# Altium PCB PCB_mathpad1_2024-01-19.pcbdoc
Units mm, origin at the board's own origin, x right, y up, seen from the top; angles counter-clockwise.
Board outline 193.1 x 243.5 mm, 2 copper layers (Top Layer, Bottom Layer); 89 components, 64 nets, 319 pads, 90 vias.
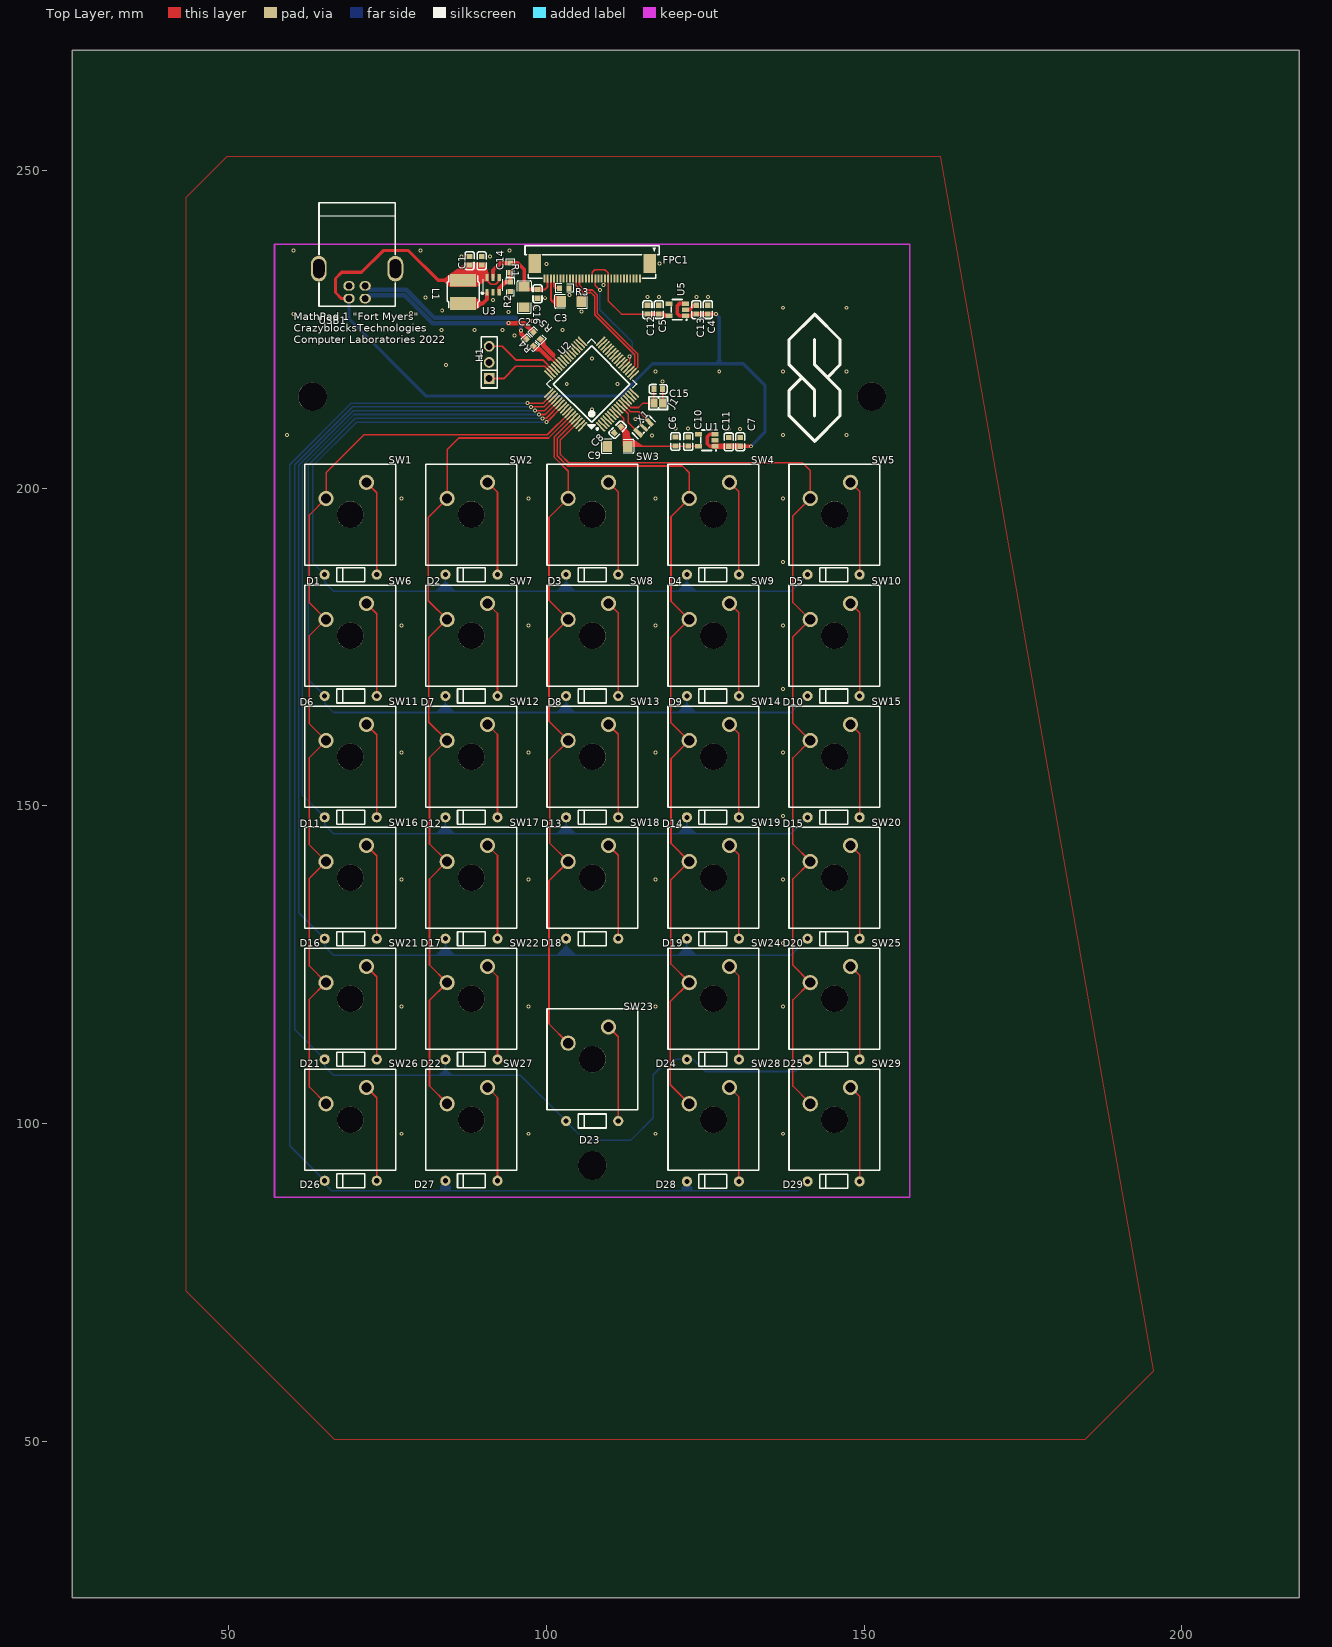
[diagram p0: Top Layer view]
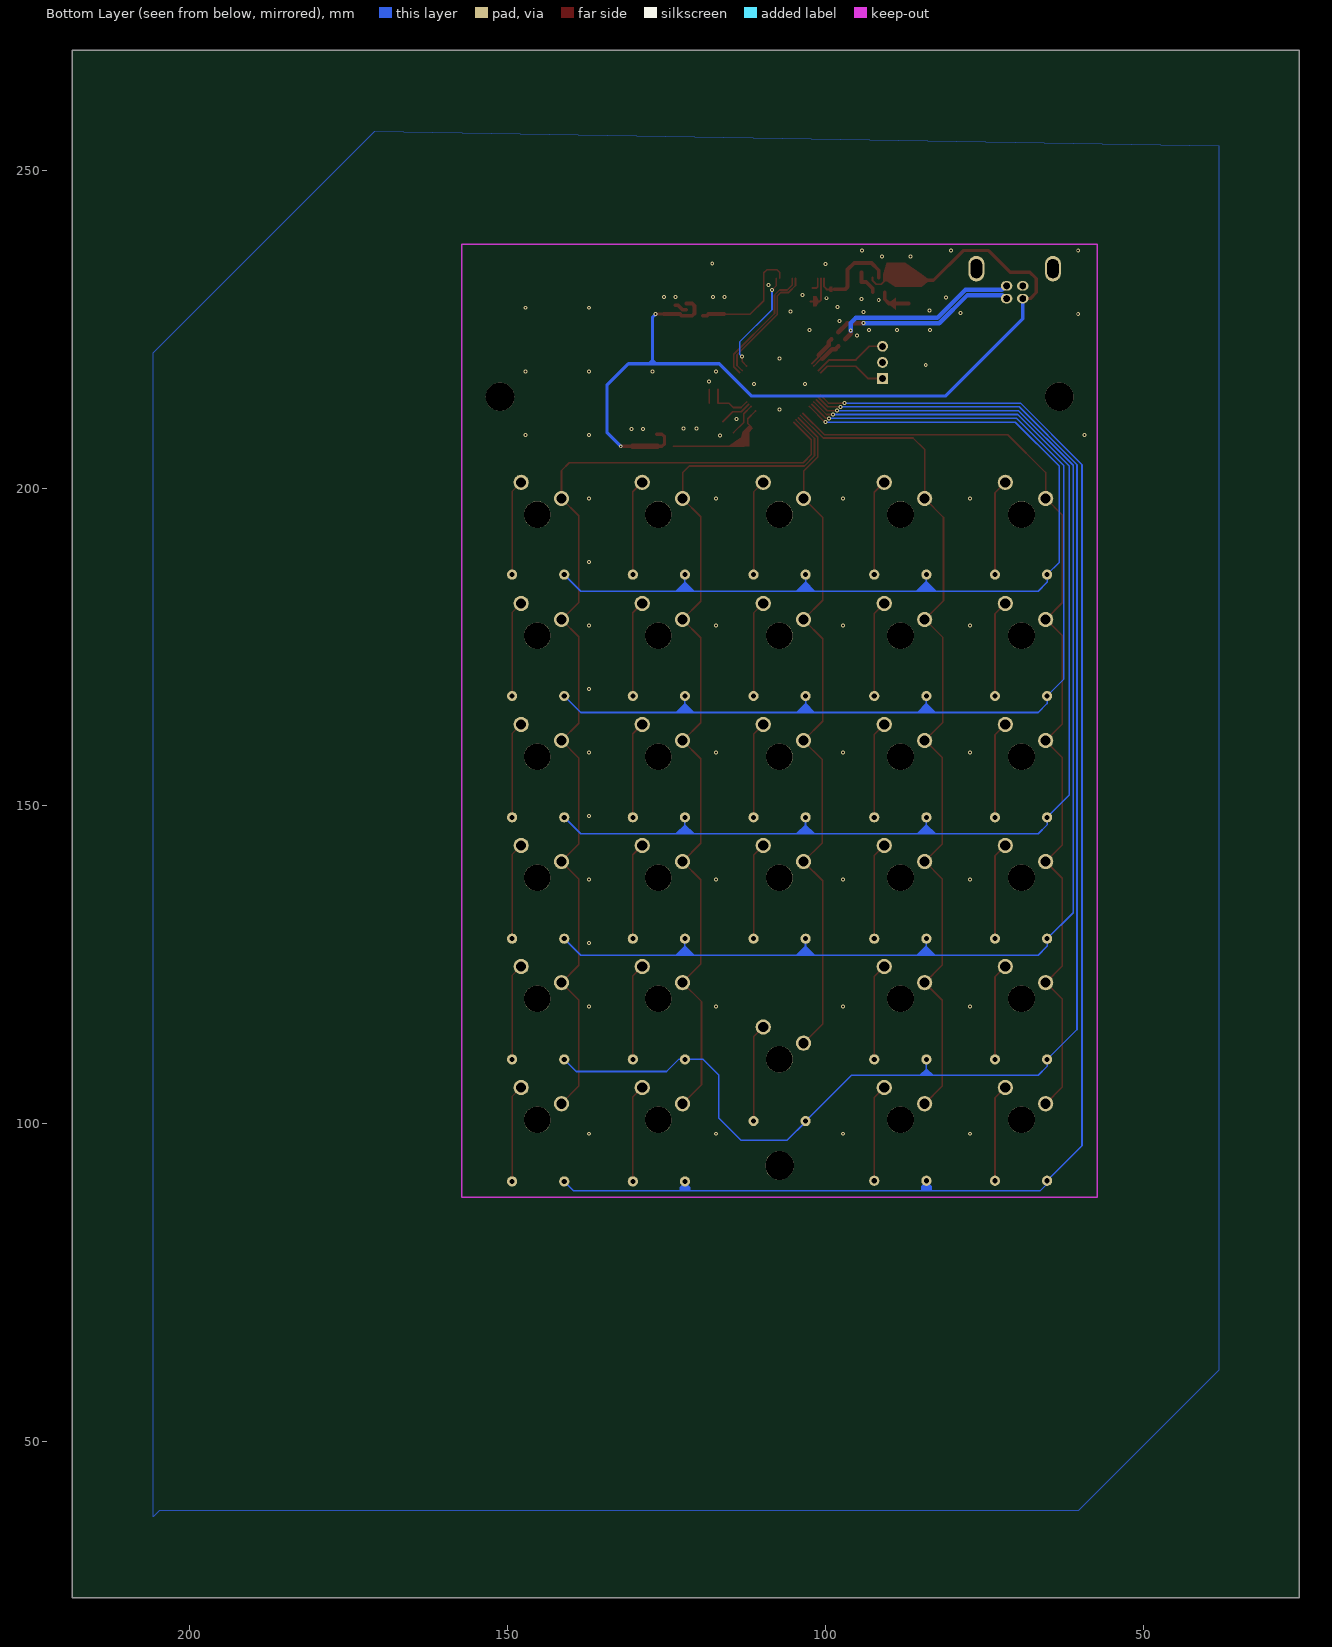
[diagram p1: Bottom Layer view, seen from below]

## Layer stack, top to bottom
Top Layer: signal copper (thickness not stored)
Dielectric: dielectric 0.32, FR-4, Dk 4.8
Bottom Layer: signal copper (thickness not stored)

## Board outline
218.5,25.4 25.4,25.4 25.4,268.9 218.5,268.9

## Components (designator, comment, footprint, x,y, rotation, side; value= is the part's Value field where it differs from the comment)
C1 "1uF" C0603 87.9,235.8 r270 top
C2 "4.7uF" C1206 96.5,230.1 r270 top
C3 "4.7uF" C1206 103.9,229.4 r0 top
C4 "1uF" C0603 125.4,228.1 r270 top
C5 "1uF" C0603 117.7,228.1 r270 top
C6 "1uF" C0603 120.3,207.35 r270 top
C7 "1uF" C0603 130.5,207.3 r270 top
C8 "100nF" C0603 111.2,209.2 r225 top
C9 "4.7uF" C1206 111.2,206.6 r180 top
C10 "100nF" C0603 122.32,207.35 r90 top
C11 "100nF" C0603 128.7,207.3 r90 top
C12 "100nF" C0603 115.9,228.1 r90 top
C13 "100nF" C0603 123.6,228.1 r90 top
C14 "100nF" C0603 89.8,235.8 r90 top
C15 "100nF" C0603 117.6,215.6 r0 top
C16 "100nF" C0603 98.6,230.6 r270 top
D1 "1N4148TR-C84412" DO-35_BD2.0-L4.2-P8.20-D0.5-RD 69.2,186.4 r0 top
D2 "1N4148TR-C84412" DO-35_BD2.0-L4.2-P8.20-D0.5-RD 88.2,186.4 r0 top
D3 "1N4148TR-C84412" DO-35_BD2.0-L4.2-P8.20-D0.5-RD 107.2,186.4 r0 top
D4 "1N4148TR-C84412" DO-35_BD2.0-L4.2-P8.20-D0.5-RD 126.2,186.4 r0 top
D5 "1N4148TR-C84412" DO-35_BD2.0-L4.2-P8.20-D0.5-RD 145.2,186.4 r0 top
D6 "1N4148TR-C84412" DO-35_BD2.0-L4.2-P8.20-D0.5-RD 69.2,167.3 r0 top
D7 "1N4148TR-C84412" DO-35_BD2.0-L4.2-P8.20-D0.5-RD 88.2,167.3 r0 top
D8 "1N4148TR-C84412" DO-35_BD2.0-L4.2-P8.20-D0.5-RD 107.2,167.3 r0 top
D9 "1N4148TR-C84412" DO-35_BD2.0-L4.2-P8.20-D0.5-RD 126.2,167.3 r0 top
D10 "1N4148TR-C84412" DO-35_BD2.0-L4.2-P8.20-D0.5-RD 145.2,167.3 r0 top
D11 "1N4148TR-C84412" DO-35_BD2.0-L4.2-P8.20-D0.5-RD 69.2,148.2 r0 top
D12 "1N4148TR-C84412" DO-35_BD2.0-L4.2-P8.20-D0.5-RD 88.2,148.2 r0 top
D13 "1N4148TR-C84412" DO-35_BD2.0-L4.2-P8.20-D0.5-RD 107.2,148.2 r0 top
D14 "1N4148TR-C84412" DO-35_BD2.0-L4.2-P8.20-D0.5-RD 126.2,148.2 r0 top
D15 "1N4148TR-C84412" DO-35_BD2.0-L4.2-P8.20-D0.5-RD 145.2,148.2 r0 top
D16 "1N4148TR-C84412" DO-35_BD2.0-L4.2-P8.20-D0.5-RD 69.2,129.1 r0 top
D17 "1N4148TR-C84412" DO-35_BD2.0-L4.2-P8.20-D0.5-RD 88.2,129.1 r0 top
D18 "1N4148TR-C84412" DO-35_BD2.0-L4.2-P8.20-D0.5-RD 107.2,129.1 r0 top
D19 "1N4148TR-C84412" DO-35_BD2.0-L4.2-P8.20-D0.5-RD 126.2,129.1 r0 top
D20 "1N4148TR-C84412" DO-35_BD2.0-L4.2-P8.20-D0.5-RD 145.2,129.1 r0 top
D21 "1N4148TR-C84412" DO-35_BD2.0-L4.2-P8.20-D0.5-RD 69.2,110.1 r0 top
D22 "1N4148TR-C84412" DO-35_BD2.0-L4.2-P8.20-D0.5-RD 88.2,110.1 r0 top
D23 "1N4148TR-C84412" DO-35_BD2.0-L4.2-P8.20-D0.5-RD 107.2,100.4 r0 top
D24 "1N4148TR-C84412" DO-35_BD2.0-L4.2-P8.20-D0.5-RD 126.2,110.1 r0 top
D25 "1N4148TR-C84412" DO-35_BD2.0-L4.2-P8.20-D0.5-RD 145.2,110.1 r0 top
D26 "1N4148TR-C84412" DO-35_BD2.0-L4.2-P8.20-D0.5-RD 69.2,91 r0 top
D27 "1N4148TR-C84412" DO-35_BD2.0-L4.2-P8.20-D0.5-RD 88.2,91 r0 top
D28 "1N4148TR-C84412" DO-35_BD2.0-L4.2-P8.20-D0.5-RD 126.2,90.9 r0 top
D29 "1N4148TR-C84412" DO-35_BD2.0-L4.2-P8.20-D0.5-RD 145.2,90.9 r0 top
FPC1 "0.5K-AX-31PWB" FPC-SMD_31P-P0.50_HDGC_0.5K-AX-31PWB 107.2,234.2 r180 top
H1 "DZ254R-11-03-63" HDR-TH_3P-P2.54-V-M 91,219.8 r90 top
J1 "JUMPER_SOLDER_1X2" JUMPER_SOLDER_1X2 117.6,213.4 r180 top
L1 "10uH" IND-SMD_L5.0-W5.0_LQH5BPBXX 86.9,230.9 r270 top
R1 "1M" R0603 94.3,234.7 r270 top
R2 "68K" R0603 94.3,231.7 r270 top
R3 "910K" R0603 102.8,231.5 r180 top
R4 "0" R0603 97.4,222.9 r135 top
R5 "0" R0603 98.5,224 r135 top
SW1 "CPG151101D93" SW-TH_CPG151101D9X 68.5,199.65 r0 top
SW2 "CPG151101D93" SW-TH_CPG151101D9X 87.55,199.65 r0 top
SW3 "CPG151101D93" SW-TH_CPG151101D9X 106.6,199.65 r0 top
SW4 "CPG151101D93" SW-TH_CPG151101D9X 125.65,199.65 r0 top
SW5 "CPG151101D93" SW-TH_CPG151101D9X 144.7,199.65 r0 top
SW6 "CPG151101D93" SW-TH_CPG151101D9X 68.5,180.6 r0 top
SW7 "CPG151101D93" SW-TH_CPG151101D9X 87.55,180.6 r0 top
SW8 "CPG151101D93" SW-TH_CPG151101D9X 106.6,180.6 r0 top
SW9 "CPG151101D93" SW-TH_CPG151101D9X 125.65,180.6 r0 top
SW10 "CPG151101D93" SW-TH_CPG151101D9X 144.7,180.6 r0 top
SW11 "CPG151101D93" SW-TH_CPG151101D9X 68.5,161.55 r0 top
SW12 "CPG151101D93" SW-TH_CPG151101D9X 87.55,161.55 r0 top
SW13 "CPG151101D93" SW-TH_CPG151101D9X 106.6,161.55 r0 top
SW14 "CPG151101D93" SW-TH_CPG151101D9X 125.65,161.55 r0 top
SW15 "CPG151101D93" SW-TH_CPG151101D9X 144.7,161.55 r0 top
SW16 "CPG151101D93" SW-TH_CPG151101D9X 68.5,142.5 r0 top
SW17 "CPG151101D93" SW-TH_CPG151101D9X 87.55,142.5 r0 top
SW18 "CPG151101D93" SW-TH_CPG151101D9X 106.6,142.5 r0 top
SW19 "CPG151101D93" SW-TH_CPG151101D9X 125.65,142.5 r0 top
SW20 "CPG151101D93" SW-TH_CPG151101D9X 144.7,142.5 r0 top
SW21 "CPG151101D93" SW-TH_CPG151101D9X 68.5,123.45 r0 top
SW22 "CPG151101D93" SW-TH_CPG151101D9X 87.55,123.45 r0 top
SW23 "CPG151101D93" SW-TH_CPG151101D9X 106.6,113.925 r0 top
SW24 "CPG151101D93" SW-TH_CPG151101D9X 125.65,123.45 r0 top
SW25 "CPG151101D93" SW-TH_CPG151101D9X 144.7,123.45 r0 top
SW26 "CPG151101D93" SW-TH_CPG151101D9X 68.5,104.4 r0 top
SW27 "CPG151101D93" SW-TH_CPG151101D9X 87.55,104.4 r0 top
SW28 "CPG151101D93" SW-TH_CPG151101D9X 125.65,104.4 r0 top
SW29 "CPG151101D93" SW-TH_CPG151101D9X 144.7,104.4 r0 top
U1 "RT9078-33GJ5" TSOT-23-5_L2.9-W1.6-P0.95-LS2.8-BR 125.23,207.55 r0 top
U2 "STM32G0B1RCT6" LQFP-64_L10.0-W10.0-P0.50-LS12.0-BL 107.1,216.4 r45 top
U3 "TLV61046ADBVR" SOT-23-6_L2.9-W1.6-P0.95-LS2.8-BL 91.6,232 r0 top
U5 "RT9078-33GJ5" TSOT-23-5_L2.9-W1.6-P0.95-LS2.8-BR 120.6,228.1 r0 top
USB1 "U241-041N-1BR85-1" USB-B-TH_U241-041N-1BR85-1 70.2,232.2 r180 top
X1 "8MHz" OSC-SMD_3P-L3.2-W1.3-P1.2-L 115.3,209.6 r45 top

## Footprints (in the part's own frame and the unit in brackets; to place one, negate y for a bottom-side part, rotate by r counter-clockwise, add the part's x,y. Pads: shape width x height; smd on the part's side, far side on the other; paste and mask are expansions set on the pad)
C0603 [mm]
  rect 0.8x0.9 smd paste+0 mask+0.051: 1(-0.7,0) 2(0.7,0)
  silkscreen extent -1.41,-0.71 1.39,0.72
C1206 [mm]
  rect 1.485x1.728 smd paste-100 mask+0.051: 1(-1.593,0) 2(1.593,0)
  silkscreen extent -2.56,-1.09 2.56,1.09
DO-35_BD2.0-L4.2-P8.20-D0.5-RD [mm]
  round 1.6 hole 0.8 paste+0 mask+0.051: 1(-4.1,0) 2(4.1,0)
  silkscreen extent -2.2,-1.1 2.2,1.1
FPC-SMD_31P-P0.50_HDGC_0.5K-AX-31PWB [mm]
  rect 0.3x1.25 smd paste+0 mask+0.05: 1(-7.5,1.163) 2(-7,1.163) 3(-6.5,1.163) 4(-6,1.163) 5(-5.5,1.163) 6(-5,1.163) 7(-4.5,1.163) 8(-4,1.163) 9(-3.5,1.163) 10(-3,1.163) 11(-2.5,1.163) 12(-2,1.163) 13(-1.5,1.163) 14(-1,1.163) 15(-0.5,1.163) 16(0,1.163) 17(0.5,1.163) 18(1,1.163) 19(1.5,1.163) 20(2,1.163) 21(2.5,1.163) 22(3,1.163) 23(3.5,1.163) 24(4,1.163) 25(4.5,1.163) 26(5,1.163) 27(5.5,1.163) 28(6,1.163) 29(6.5,1.163) 30(7,1.163) 31(7.5,1.163)
  rect 2x3 smd paste+0 mask+0.05: 32(9.04,-1.162) 33(-9.04,-1.162)
  silkscreen extent -10.57,-3.96 10.58,1.16
HDR-TH_3P-P2.54-V-M [mm]
  rect 1.7x1.7 hole 1.1 paste+0 mask+0.051: 1(-2.54,0)
  round 1.7 hole 1.1 paste+0 mask+0.051: 2(0,0) 3(2.54,0)
  silkscreen extent -4.02,-1.27 4.02,1.27
IND-SMD_L5.0-W5.0_LQH5BPBXX [mm]
  rect 2x4.1 smd paste+0 mask+0.051: 1(-1.825,0) 2(1.824,0)
  silkscreen extent -2.52,-2.5 2.5,2.5
JUMPER_SOLDER_1X2 [mil]
  rect 45x56 smd paste+0 mask+2: 1(-26,0) 2(26,0)
  silkscreen extent -58,-39 58,39
LQFP-64_L10.0-W10.0-P0.50-LS12.0-BL [mm]
  oval 0.3x2 smd paste+0 mask+0.051: 1(-3.75,-5.75) 2(-3.25,-5.75) 3(-2.75,-5.75) 4(-2.25,-5.75) 5(-1.75,-5.75) 6(-1.25,-5.75) 7(-0.75,-5.75) 8(-0.25,-5.75) 9(0.25,-5.75) 10(0.75,-5.75) 11(1.25,-5.75) 12(1.75,-5.75) 13(2.25,-5.75) 14(2.75,-5.75) 15(3.25,-5.75) 16(3.75,-5.75) 33(3.75,5.75) 34(3.25,5.75) 35(2.75,5.75) 36(2.25,5.75) 37(1.75,5.75) 38(1.25,5.75) 39(0.75,5.75) 40(0.25,5.75) 41(-0.25,5.75) 42(-0.75,5.75) 43(-1.25,5.75) 44(-1.75,5.75) 45(-2.25,5.75) 46(-2.75,5.75) 47(-3.25,5.75) 48(-3.75,5.75)
  oval 2x0.3 smd paste+0 mask+0.051: 17(5.75,-3.75) 18(5.75,-3.25) 19(5.75,-2.75) 20(5.75,-2.25) 21(5.75,-1.75) 22(5.75,-1.25) 23(5.75,-0.75) 24(5.75,-0.25) 25(5.75,0.25) 26(5.75,0.75) 27(5.75,1.25) 28(5.75,1.75) 29(5.75,2.25) 30(5.75,2.75) 31(5.75,3.25) 32(5.75,3.75) 49(-5.75,3.75) 50(-5.75,3.25) 51(-5.75,2.75) 52(-5.75,2.25) 53(-5.75,1.75) 54(-5.75,1.25) 55(-5.75,0.75) 56(-5.75,0.25) 57(-5.75,-0.25) 58(-5.75,-0.75) 59(-5.75,-1.25) 60(-5.75,-1.75) 61(-5.75,-2.25) 62(-5.75,-2.75) 63(-5.75,-3.25) 64(-5.75,-3.75)
  silkscreen extent -5,-5.79 5,5
OSC-SMD_3P-L3.2-W1.3-P1.2-L [mm]
  rect 0.65x1.7 smd paste+0 mask+0.051: 1(-1.2,0) 3(1.2,0)
  rect 0.5x1.7 smd paste+0 mask+0.051: 2(0,0)
  silkscreen extent -1.9,-0.65 1.9,0.65
R0603 [mm]
  rect 0.806x0.864 smd paste-100 mask+0.051: 1(-0.753,0) 2(0.753,0)
  silkscreen extent -1.39,-0.66 1.39,0.66
SOT-23-6_L2.9-W1.6-P0.95-LS2.8-BL [mm]
  rect 0.532x1.072 smd paste+0 mask+0.051: 1(-0.95,-1.149) 2(0,-1.149) 3(0.95,-1.149) 4(0.95,1.149) 5(0,1.149) 6(-0.95,1.149)
  silkscreen extent -1.82,-1.45 1.54,0.89
SW-TH_CPG151101D9X [mm]
  round 2.4 hole 1.6 paste+0 mask+0.051: 1(-3.175,-1.27) 2(3.175,1.27)
  round 4.2 hole 4.2 unplated paste+0: ""(0.635,-3.81)
  silkscreen extent -6.51,-11.76 7.79,4.13
TSOT-23-5_L2.9-W1.6-P0.95-LS2.8-BR [mm]
  rect 1.1x0.7 smd paste+0 mask+0.051: 1(1.294,-0.951) 2(1.294,-0.001) 3(1.294,0.951) 4(-1.294,0.951) 5(-1.294,-0.949)
  silkscreen extent -0.97,-1.65 1.52,1.61
USB-B-TH_U241-041N-1BR85-1 [mm]
  oval 1.8x1.5 hole 1 paste+0 mask+0.051: 1(1.27,2.355) 2(-1.27,2.355) 3(-1.27,0.355) 4(1.27,0.355)
  oval 2.5x4 hole 1.8 slot 3 at 90 deg paste+0 mask+0.051: 5(6.025,-2.355) 6(-6.025,-2.355)
  silkscreen extent -6,-12.76 6,3.55

## Free pads (board coordinates)
  round 4.5 hole 4.5 unplated paste+0: ""(63.2,214.4) ""(107.2,93.4) ""(151.2,214.4)

## Via types
v1: diameter 0.62, hole 0.31, Top Layer to Bottom Layer, tented both sides, 90 vias

## Nets (pads, with @x,y where several pads share a name; then routed paths per layer and width w, separated by ;. In a path a pad name is that pad's centre, name@x,y a point inside that pad or via, vN(x,y) a via of type N, cw(c..) or ccw(c..) an arc to the next point about the centre after c; other vN are vias at no path point)
D2_2: D2.2 SW2.2 | length 15.2
  Top Layer w0.25: SW2.2 92.3,199.345 D2.2
D3_2: D3.2 SW3.2 | length 15.2
  Top Layer w0.25: SW3.2 111.3,199.395 D3.2
D4_2: D4.2 SW4.2 | length 15.1
  Top Layer w0.25: SW4.2 130.3,199.445 D4.2
D5_2: D5.2 SW5.2 | length 15.1
  Top Layer w0.25: SW5.2 149.3,199.495 D5.2
D6_2: D6.2 SW6.2 | length 15.2
  Top Layer w0.25: SW6.2 73.3,180.245 D6.2
D7_2: D7.2 SW7.2 | length 15.2
  Top Layer w0.25: SW7.2 92.3,180.295 D7.2
D8_2: D8.2 SW8.2 | length 15.2
  Top Layer w0.25: SW8.2 111.3,180.345 D8.2
D9_2: D9.2 SW9.2 | length 15.2
  Top Layer w0.25: SW9.2 130.3,180.395 D9.2
D10_2: D10.2 SW10.2 | length 15.2
  Top Layer w0.25: SW10.2 149.3,180.445 D10.2
D11_2: D11.2 SW11.2 | length 15.3
  Top Layer w0.25: SW11.2 73.3,161.195 D11.2
D12_2: D12.2 SW12.2 | length 15.3
  Top Layer w0.25: SW12.2 92.3,161.245 D12.2
D13_2: D13.2 SW13.2 | length 15.3
  Top Layer w0.25: SW13.2 111.3,161.295 D13.2
D14_2: D14.2 SW14.2 | length 15.2
  Top Layer w0.25: SW14.2 130.3,161.345 D14.2
D15_2: D15.2 SW15.2 | length 15.2
  Top Layer w0.25: SW15.2 149.3,161.395 D15.2
D16_2: D16.2 SW16.2 | length 15.3
  Top Layer w0.25: SW16.2 73.3,142.145 D16.2
D17_2: D17.2 SW17.2 | length 15.3
  Top Layer w0.25: SW17.2 92.3,142.195 D17.2
D18_2: D18.2 SW18.2 | length 15.3
  Top Layer w0.25: SW18.2 111.3,142.245 D18.2
D19_2: D19.2 SW19.2 | length 15.3
  Top Layer w0.25: SW19.2 130.3,142.295 D19.2
D20_2: D20.2 SW20.2 | length 15.3
  Top Layer w0.25: SW20.2 149.3,142.345 D20.2
D21_2: D21.2 SW21.2 | length 15.3
  Top Layer w0.25: SW21.2 73.3,123.095 D21.2
D22_2: D22.2 SW22.2 | length 15.3
  Top Layer w0.25: SW22.2 92.3,123.145 D22.2
D23_2: D23.2 SW23.2 | length 15.4
  Top Layer w0.25: SW23.2 111.3,113.67 D23.2
D24_2: D24.2 SW24.2 | length 15.2
  Top Layer w0.25: SW24.2 130.3,123.245 D24.2
D25_2: D25.2 SW25.2 | length 15.2
  Top Layer w0.25: SW25.2 149.3,123.295 D25.2
D26_2: D26.2 SW26.2 | length 15.3
  Top Layer w0.25: SW26.2 73.3,104.045 D26.2
D27_2: D27.2 SW27.2 | length 15.3
  Top Layer w0.25: SW27.2 92.3,104.095 D27.2
D28_2: D28.2 SW28.2 | length 15.4
  Top Layer w0.25: SW28.2 130.3,104.195 D28.2
D29_2: D29.2 SW29.2 | length 15.4
  Top Layer w0.25: SW29.2 149.3,104.245 D29.2
DISP_3V3_IO: C5.2 C12.1 FPC1.11 FPC1.16 U5.5 | length 18.8
  Top Layer w0.25: FPC1.16 107.2,234 107.599,234.399 109.199,234.399 109.699,233.899 FPC1.11 ; FPC1.11 109.7,229.5 111.8,227.4 C12.1
  Top Layer w0.6: C12.1 118.4,227.4 118.649,227.151 U5.5
DISP_12V: C2.1 C16.1 FPC1.30 R1.1 U3.5 | length 15
  Top Layer w0.3: C16.1 99.8,231.3 100.2,231.699 FPC1.30
  Top Layer w0.6: U3.5 91.6,234.3 92.753,235.453 R1.1 95.447,235.453 96.5,234.4 C2.1 96.892,231.3 C16.1
DISP_CL: FPC1.20 U2.18 | length 19.8
  Top Layer w0.25: FPC1.20@105.201,233.038 105.201,231.999 106.001,231.199 107.2,231.199 108,230.399 108,227.5 114.401,221.1 114.401,219.103 U2.18
DISP_CS: FPC1.15 U2.21 | length 16.7
  Top Layer w0.25: FPC1.15 107.7,231.9 v1(108.4,231.2) ; U2.21 113.1,219.925 v1@113.1,220.7
  Bottom Layer w0.25: v1(108.4,231.2) 108.4,228.1 113.5,223 113.5,221.1 v1(113.1,220.7)
DISP_DO: FPC1.21 U2.19 | length 19.4
  Top Layer w0.25: FPC1.21 104.7,231.9 105.7,230.9 ; 105.699,230.899 105.8,230.8 106.999,230.8 107.599,230.2 107.599,227.3 113.9,221.001 113.9,219.311 U2.19
FPC1_28: FPC1.28 R3.2 | length 2.3
  Top Layer w0.3: FPC1.28@101.2,233.038 101.2,231.699 101.401,231.498 R3.2@102.046,231.498
FPC1_29: C3.1 FPC1.29 | length 5.1
  Top Layer w0.3: FPC1.29 100.7,229.598 100.901,229.4 C3.1@102.308,229.4
GND: C1.1 C2.2 C3.2 C4.1 C5.1 C6.1 C7.1 C8.2 C9.2 C10.2 C11.2 C12.2 C13.2 C14.2 C15.2 C16.2 FPC1.1 FPC1.2 FPC1.12 FPC1.13 FPC1.17 FPC1.18 FPC1.19 FPC1.32 FPC1.33 H1.2 J1.1 R2.2 R3.1 U1.2 U2.9 U3.2 U5.2 USB1.4 USB1.5 USB1.6 X1.2 | length 4.2
  Top Layer w0.25: J1.1@118.262,213.398 118.3,213.398 C15.2
  Top Layer w0.6: U5.2 122.499,228.099 123.2,228.8 C13.2
  other v1: 77.2,98.4 97.2,98.4 117.2,98.4 137.2,98.4 77.2,118.4 97.2,118.4 117.2,118.4 137.2,118.4 137.2,128.4 77.2,138.4 97.2,138.4 117.2,138.4 137.2,138.4 137.2,148.4 77.2,158.4 97.2,158.4 117.2,158.4 137.2,158.4 137.2,168.4 77.2,178.4 97.2,178.4 117.2,178.4 137.2,178.4 137.2,188.4 77.2,198.4 97.2,198.4 117.2,198.4 137.2,198.4 116.6,208.3 59.2,208.4 137.2,208.4 147.2,208.4 128.7,209.3 130.5,209.3 120.3,209.4 122.3,209.4 114,210.9 107.2,212.4 103.2,216.4 111.2,216.4 118.3,216.8 117.2,218.4 127.2,218.4 137.2,218.4 147.2,218.4 84.2,219.4 107.2,220.4 95,224 83.5,224.899 88.7,224.899 93.1,224.899 102.5,224.899 97.8,226.3 60.2,227.4 78.7,227.6 94,227.7 105.5,227.8 83.6,228 137.2,228.4 147.2,228.4 98.1,228.5 91.6,229.6 94.3,229.8 99.8,229.899 81,230 115.9,230.1 117.7,230.1 123.6,230.1 125.4,230.1 108.96,231.99 100,235.3 117.8,235.4 86.6,236.5 91.1,236.5 60.2,237.4 80.2,237.4 94.2,237.4
H1_1: H1.1 U2.47 | length 11
  Top Layer w0.3: H1.1 93.26,217.259 95.201,219.2 99.704,219.2 U2.47@100.736,218.166
H1_3: H1.3 U2.46 | length 11.7
  Top Layer w0.3: H1.3 93.06,222.339 95.2,220.2 99.4,220.2 U2.46
KEY_C1: SW1.1 SW6.1 SW11.1 SW16.1 SW21.1 SW26.1 U2.58 | length 152.4
  Top Layer w0.25: SW26.1 62.7,105.755 62.7,119.6 65.28,122.18 SW21.1 ; SW21.1@65.325,122.179 62.699,124.806 62.699,138.6 SW16.1@65.325,141.229 ; SW16.1 62.7,143.855 62.7,157.6 65.325,160.225 SW11.1 62.7,162.905 62.7,176.8 65.23,179.33 SW6.1 62.7,181.955 62.7,195.8 65.28,198.38 SW1.1 65.336,202.469 71.297,208.4 100.144,208.4 U2.58@103.565,211.803
KEY_C2: SW2.1 SW7.1 SW12.1 SW17.1 SW22.1 SW27.1 U2.59 | length 136.6
  Top Layer w0.25: SW27.1@84.375,103.129 81.599,105.906 81.599,119.401 SW22.1@84.375,122.179 ; SW22.1 81.6,124.955 81.6,138.5 84.33,141.23 SW17.1 81.6,144.005 81.6,157.6 84.28,160.28 SW12.1 81.5,163.155 81.5,176.5 84.33,179.33 SW7.1 81.401,182.304 81.401,195.4 84.375,198.379 84.375,206.076 86.199,207.899 100.344,207.899 U2.59
KEY_C3: SW3.1 SW8.1 SW13.1 SW18.1 SW23.1 U2.60 | length 110.6
  Top Layer w0.25: SW23.1@103.425,112.654 100.4,115.679 100.4,138.199 SW18.1@103.425,141.229 ; SW18.1 100.5,144.155 100.5,157.3 103.425,160.225 SW13.1 ; SW13.1@103.425,160.279 100.4,163.304 100.4,176.299 103.425,179.329 100.4,182.355 100.4,195.4 103.38,198.38 SW3.1 103.425,202.674 101.2,204.9 101.2,208.034 U2.60
KEY_C4: SW4.1 SW9.1 SW14.1 SW19.1 SW24.1 SW28.1 U2.61 | length 140.1
  Top Layer w0.25: U2.61 101.701,207.823 101.701,205.098 103.298,203.5 121.401,203.5 122.475,202.423 122.475,198.379 119.6,195.504 119.6,182.2 122.475,179.329 119.6,176.455 119.6,163.1 122.42,160.28 SW14.1 ; SW28.1@122.475,103.129 119.499,106.101 119.499,119.205 SW24.1@122.475,122.179 ; SW24.1 122.475,122.225 119.6,125.1 119.6,138.355 SW19.1 ; SW19.1@122.475,141.229 119.6,144.1 119.6,157.404 SW14.1@122.475,160.279
KEY_C5: SW5.1 SW10.1 SW15.1 SW20.1 SW25.1 SW29.1 U2.62 | length 157.6
  Top Layer w0.25: U2.62@104.98,210.388 102.201,207.61 102.201,205.298 103.499,204 140.299,204 141.525,202.774 141.525,198.379 138.8,195.655 138.8,182 141.47,179.33 SW10.1 138.8,176.604 138.8,163 SW15.1@141.525,160.279 ; SW29.1 141.525,103.175 138.8,105.9 138.8,119.455 SW25.1 ; SW25.1@141.525,122.179 138.8,124.9 138.8,138.504 SW20.1@141.525,141.229 ; SW20.1 141.525,141.275 138.8,144 138.8,157.555 SW15.1
KEY_R1: D1.1 D2.1 D3.1 D4.1 D5.1 U2.55 | length 155.7
  Top Layer w0.25: v1(100,210.4) 100.039,210.4 U2.55
  Bottom Layer w0.25: D1.1 63.199,188.301 63.199,203.5 70.101,210.399 v1@99.999,210.399 ; D1.1 65.1,185.2 66.5,183.8 138.5,183.8 D5.1 ; 82.606,183.8 84.1,185.3 ; D2.1@84.1,186.503 84.1,185.299 85.605,183.8 ; 101.695,183.803 103.1,185.2 ; D3.1@103.1,186.403 103.1,185.199 104.496,183.803 ; 120.695,183.803 122.1,185.2 ; D4.1@122.1,186.403 122.1,185.199 123.496,183.803
KEY_R2: D6.1 D7.1 D8.1 D9.1 D10.1 U2.54 | length 175.4
  Top Layer w0.25: v1(99.4,211) 99.956,211.001 U2.54
  Bottom Layer w0.25: 82.695,164.703 84.1,166.1 ; D7.1@84.1,167.303 84.1,166.099 85.497,164.703 ; v1(99.4,211) 69.9,211 62.5,203.6 62.5,169.9 D6.1 65.1,166.1 66.5,164.7 138.5,164.7 D10.1 ; 101.695,164.703 103.1,166.1 ; D8.1@103.1,167.303 103.1,166.099 ; 104.496,164.703 103.1,166.099 ; 120.692,164.7 122.096,166.097 ; D9.1@122.097,167.3 122.097,166.096 123.493,164.7
KEY_R3: D11.1 D12.1 D13.1 D14.1 D15.1 U2.53 | length 195.5
  Top Layer w0.25: v1(98.8,211.6) 99.826,211.6 U2.53@101.797,213.571
  Bottom Layer w0.25: D11.1 61.599,151.699 61.599,203.5 69.699,211.6 v1(98.8,211.6) ; D11.1 65.1,147 66.5,145.6 138.5,145.6 D15.1 ; 82.696,145.6 84.1,146.997 ; D12.1 84.101,146.996 85.497,145.6 ; 101.72,145.6 103.125,146.997 ; D13.1@103.125,148.2 103.125,146.996 104.521,145.6 ; 120.697,145.6 122.101,146.997 ; D14.1 122.102,146.996 123.498,145.6
KEY_R4: D16.1 D17.1 D18.1 D19.1 D20.1 U2.52 | length 215.2
  Top Layer w0.25: v1@98.201,212.199 99.702,212.199 U2.52@101.444,213.924
  Bottom Layer w0.25: D16.1 61,133.2 61,203.599 69.6,212.199 v1@98.201,212.199 ; D16.1 65.1,127.9 66.5,126.5 138.5,126.5 D20.1 ; 82.744,126.5 84.149,127.897 ; D17.1@84.149,129.1 84.149,127.896 ; 85.545,126.5 84.149,127.896 ; 101.715,126.5 103.119,127.897 ; D18.1@103.12,129.1 103.12,127.896 ; 104.516,126.5 103.12,127.896 ; 120.695,126.5 122.1,127.897 ; D19.1 122.1,127.896 123.496,126.5
  other v1: 98.2,212.2
KEY_R5: D21.1 D22.1 D23.1 D24.1 D25.1 U2.51 | length 237.9
  Top Layer w0.25: v1(97.6,212.8) 99.605,212.799 U2.51@101.2,214.399
  Bottom Layer w0.25: 83.114,107.6 84.1,108.586 D22.1 ; 84.099,108.585 85.094,107.6 ; v1(97.6,212.8) 69.5,212.8 60.4,203.7 60.4,114.8 D21.1 65.1,109 66.5,107.6 95.9,107.6 D23.1 ; D23.1@103.1,100.399 103.1,100.3 106.001,97.399 113.301,97.399 116.801,100.899 116.801,107.699 119.199,110.099 D24.1 ; D24.1 123.1,110.1 125,108.2 139.2,108.2 D25.1
KEY_R6: D26.1 D27.1 D28.1 D29.1 U2.50 | length 245.6
  Top Layer w0.25: v1@96.999,213.398 99.499,213.398 U2.50@100.799,214.699
  Bottom Layer w0.25: 83.348,89.501 83.348,90.047 D27.1@84.1,90.802 ; 84.859,89.501 84.859,90.042 D27.1@84.1,90.802 ; v1(97,213.4) 69.3,213.4 59.6,203.7 59.6,96.5 D26.1 65.1,90.5 66.2,89.4 139.6,89.4 D29.1 ; 121.348,89.401 121.348,89.947 D28.1@122.1,90.701 ; 122.859,89.401 122.859,89.942 D28.1@122.1,90.701 ; D27.1@84.1,90.802 D27.1 D27.1@84.1,90.802 ; D28.1@122.1,90.701 D28.1 D28.1@122.1,90.701
S$43491: 
S$43499: 
S$43503: 
SW1_2: D1.2 SW1.2 | length 15.2
  Top Layer w0.25: SW1.2 73.3,199.295 D1.2
SYS_3V3: C6.2 C8.1 C9.1 C10.1 U1.5 U2.8 | length 17.9
  Top Layer w0.25: U2.8@110.99,212.156 112.201,210.947 112.201,210.201 111.696,209.695 112.792,208.598 C9.1 U1.5@123.936,206.6
U2_12: C15.1 J1.2 U2.12 | length 7.4
  Top Layer w0.25: U2.12 113.276,212.7 114.5,212.7 115.201,213.398 116.938,213.398 116.9,213.398 C15.1
U2_43: R5.1 U2.43 | length 5.2
  Top Layer w0.25: 101.071,220.919 101.2,220.79 101.2,220.531 U2.43
  Top Layer w0.7: R5.1 99.497,223.002 99.497,222.487 101.07,220.92
U2_44: R4.1 U2.44 | length 5.2
  Top Layer w0.25: 100.469,220.35 100.619,220.2 100.824,220.2 U2.44@101.797,219.228
  Top Layer w0.7: R4.1 98.396,221.902 98.912,221.902 100.469,220.35
U3_1: L1.2 U3.1 | length 5.1
  Top Layer w0.6: L1.2 89.975,229.075 90.65,229.75 U3.1
U3_3: R1.2 R2.1 U3.3 | length 4.3
  Top Layer w0.6: U3.3 92.55,231.45 93.553,232.453 R2.1 R1.2
USB_N: R5.2 USB1.2 | length 29.2
  Top Layer w0.7: v1(94,225.97) 96.529,225.969 R5.2@97.967,224.531
  Bottom Layer w0.7: USB1.2 71.62,229.845 72.176,230.399 77.629,230.399 82.056,225.971 v1@93.999,225.971
USB_P: R4.2 USB1.3 | length 29.9
  Top Layer w0.7: v1(96,224.8) 96,224.299 R4.2
  Bottom Layer w0.7: USB1.3 71.62,231.844 72.206,231.257 77.942,231.257 82.399,226.799 95.201,226.799 96.001,225.999 v1@96.001,224.8
VBUS: C1.2 C4.2 C7.2 C11.1 C13.1 C14.1 L1.1 U1.1 U1.3 U3.4 U3.6 U5.1 U5.3 USB1.1 | length 147.6
  Top Layer w0.3: U3.6 90.649,232.649 91.2,232.1 92.001,232.1 92.549,232.649 U3.4
  Top Layer w0.5: USB1.1 67.754,229.845 66.801,230.797 66.801,233 67.799,234 70.901,234 74.299,237.399 78.3,237.399 82.973,232.725 L1.1 ; C4.2 v1(126.7,227.4) ; U1.1 125.701,206.599 125.3,207 125.3,208.1 125.701,208.501 U1.3 ; C7.2 v1(132.2,206.6)
  Top Layer w0.6: U5.3 120.951,229.051 120.6,228.7 120.6,227.5 120.951,227.148 U5.1 122.649,227.149 122.9,227.4 C4.2
  Top Layer w0.8: U1.1@126.4,206.6 C7.2@130.375,206.6
  Bottom Layer w0.5: USB1.1 68.93,226.67 81.099,214.501 111.599,214.501 116.699,219.599 131.002,219.599 134.38,216.22 134.38,208.781 v1(132.2,206.6) ; 126.697,219.599 127.2,220.109 ; v1(126.7,227.4) 127.2,226.898 127.2,220.109 ; 128.196,219.599 127.71,219.599 127.2,220.109
X1_1: U2.10 X1.1 | length 5.3
  Top Layer w0.25: U2.10 112.859,211.699 112.859,210.343 X1.1@114.452,208.75
X1_3: U2.11 X1.3 | length 5.2
  Top Layer w0.25: U2.11 113.25,212.019 114.576,212.019 X1.3@116.148,210.447
pads on no net: FPC1.3 FPC1.4 FPC1.5 FPC1.6 FPC1.7 FPC1.8 FPC1.9 FPC1.10 FPC1.14 FPC1.22 FPC1.23 FPC1.24 FPC1.25 FPC1.26 FPC1.27 FPC1.31 SW1. SW2. SW3. SW4. SW5. SW6. SW7. SW8. SW9. SW10. SW11. SW12. SW13. SW14. SW15. SW16. SW17. SW18. SW19. SW20. SW21. SW22. SW23. SW24. SW25. SW26. SW27. SW28. SW29. U1.4 U2.1 U2.2 U2.3 U2.4 U2.5 U2.6 U2.7 U2.13 U2.14 U2.15 U2.16 U2.17 U2.20 U2.22 U2.23 U2.24 U2.25 U2.26 U2.27 U2.28 U2.29 U2.30 U2.31 U2.32 U2.33 U2.34 U2.35 U2.36 U2.37 U2.38 U2.39 U2.40 U2.41 U2.42 U2.45 U2.48 U2.49 U2.56 U2.57 U2.63 U2.64 U5.4
copper on no net:
  other v1: 103.6,230.4

## Polygon pours and split planes (outlines as drawn)
GND on Bottom Layer (solid): 38.1,253.9 38.1,61.2 60.2,39.1 204.8,39.1 205.8,38.1 205.8,221.3 170.9,256.2
GND on Top Layer (solid): 162.1,252.2 49.7,252.2 43.2,245.7 43.2,73.7 66.6,50.3 184.8,50.3 195.6,61.1

## Other copper
Top Layer:
  region net DISP_12V: 98.9,231.7 99.3,231.7 99.5,231.4 99.5,231.2 99.3,230.9 98.9,230.9
  region net U3_1: 88.9,230 89.8,229.37 89.8,228.8 88.9,228.1
  region net SYS_3V3: 111.4,209.4 111.9,210 113,208.9 113.2,208 115.3,206.6 112.5,206.6 112,206.6 112,208.8
  region net VBUS: 84.8,233.7 83.9,233 83.9,232.5 84.8,231.7 85.1,231.7 85.1,233.7
  region net VBUS: 90.9,233.7 90.3,235.5 87.4,235.5 84.8,233.7 84.8,231.7 89,231.7 90.3,232.6 90.9,232.6
  region net FPC1_29: 101.9,230.2 101.4,230.2 101,229.5 101,229.3 101.4,228.6 101.9,228.6
  region net U2_43: 101.24,220.32 101.24,220.42 100.94,220.72 100.94,220.62 101.14,220.42
  region net U2_44: 100.99,220.11 100.99,220.21 100.69,220.51 100.69,220.41 100.89,220.21
Bottom Layer:
  region net KEY_R1: 82.695,183.903 82.703,183.903 84.1,185.3 84.103,185.3 85.5,183.903
  region net KEY_R1: 101.695,183.803 101.703,183.803 103.1,185.2 103.103,185.2 104.5,183.803
  region net KEY_R1: 120.695,183.803 120.703,183.803 122.1,185.2 122.103,185.2 123.5,183.803
  region net KEY_R2: 82.695,164.703 82.703,164.703 84.1,166.1 84.103,166.1 85.5,164.703
  region net KEY_R2: 101.695,164.703 101.703,164.703 103.1,166.1 103.103,166.1 104.5,164.703
  region net KEY_R2: 120.692,164.7 120.699,164.7 122.096,166.097 122.1,166.097 123.497,164.7
  region net KEY_R3: 82.696,145.6 82.703,145.6 84.1,146.997 84.104,146.997 85.501,145.6
  region net KEY_R3: 101.72,145.6 101.728,145.6 103.125,146.997 103.128,146.997 104.525,145.6
  region net KEY_R3: 120.697,145.6 120.704,145.6 122.101,146.997 122.105,146.997 123.502,145.6
  region net KEY_R4: 82.744,126.5 82.752,126.5 84.149,127.897 84.152,127.897 85.549,126.5
  region net KEY_R4: 101.715,126.5 101.722,126.5 103.119,127.897 103.123,127.897 104.52,126.5
  region net KEY_R4: 120.695,126.5 120.703,126.5 122.1,127.897 122.103,127.897 123.5,126.5
  region net KEY_R5: 83.2,107.6 83.2,107.686 84.1,108.586 84.1,108.5 85,107.6
  region net KEY_R6: 83.4,89.501 83.4,90.001 83.8,90.401 84.4,90.401 84.8,90.101 84.8,89.501
  region net KEY_R6: 121.4,89.4 121.4,89.9 121.8,90.3 122.4,90.3 122.8,90 122.8,89.4

## Silkscreen, mask and mechanical layers (free items; w line width, h text height)
Top Overlay:
  lines w0.5 net S$43491: 138.201,223.401 142.201,227.399 146.199,223.401 ; 142.201,219.578 142.201,219.4 146.199,215.4 ; 144.2,217.401 146.199,219.4 ; 146.2,211.4 146.2,215.4 ; 146.2,219.4 146.2,223.4
  lines w0.5 net S$43499: 138.201,215.4 140.2,217.401 ; 138.201,219.596 138.201,219.4 142.201,215.4 ; 142.2,211.4 142.2,215.4 ; 142.2,219.4 142.2,223.4
  lines w0.5 net S$43503: 138.2,215.4 138.2,211.4 142.201,207.399 146.199,211.399 ; 138.2,219.4 138.2,223.4
  text "MathPad 1 \"Fort Myers\" / CrazyblocksTechnologies / Computer Laboratories 2022" at 60.2,222.8 h1.2